# Altium PCB PCB1.PcbDoc
Units mm, origin at the board's own origin, x right, y up, seen from the top; angles counter-clockwise.
Board outline 152.4 x 101.6 mm, 2 copper layers (Top Layer, Bottom Layer); 39 components, 48 nets, 253 pads, 0 vias.
Unrouted connection lines stored in the file: 123.
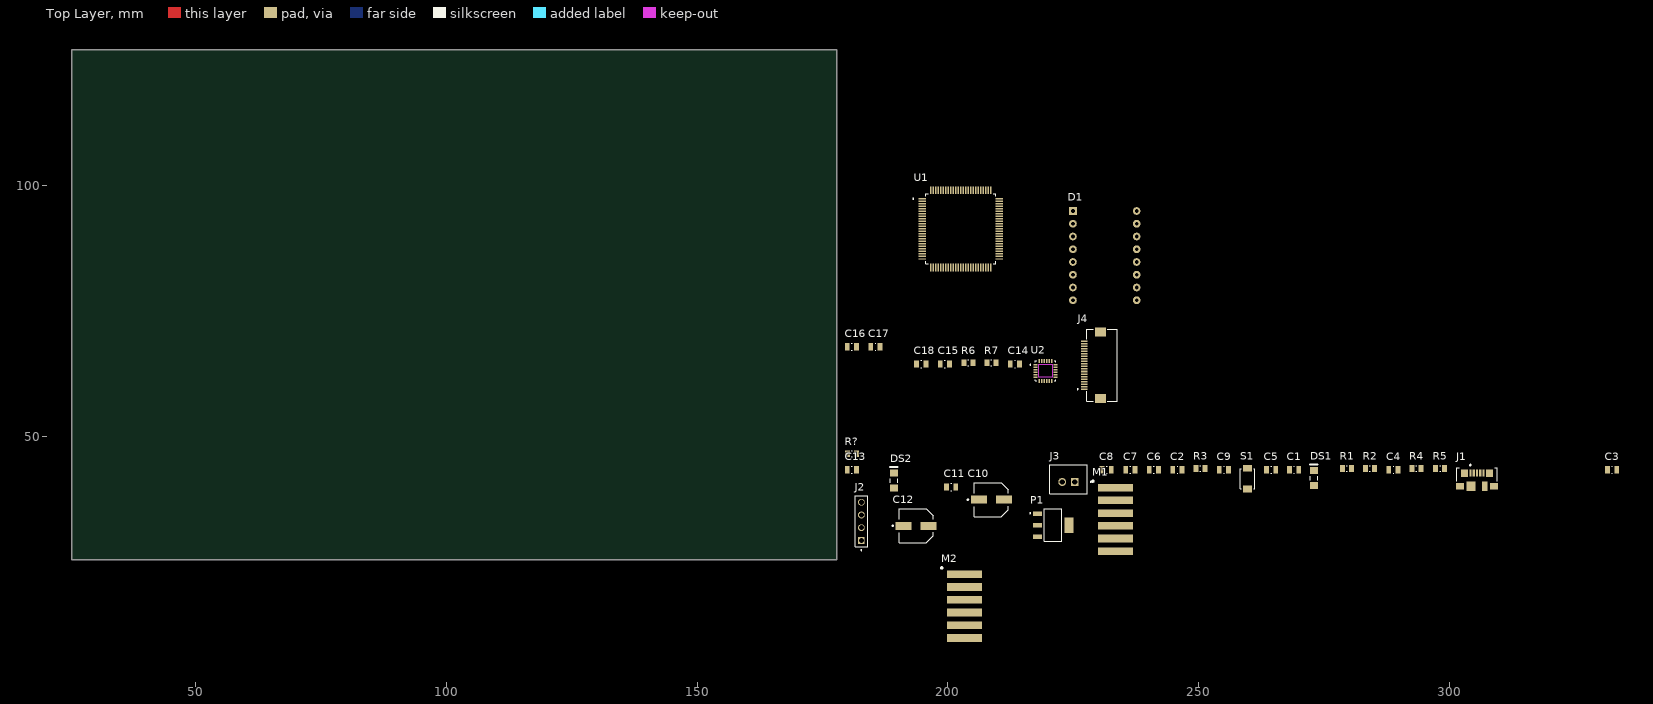
[diagram p0: Top Layer view]
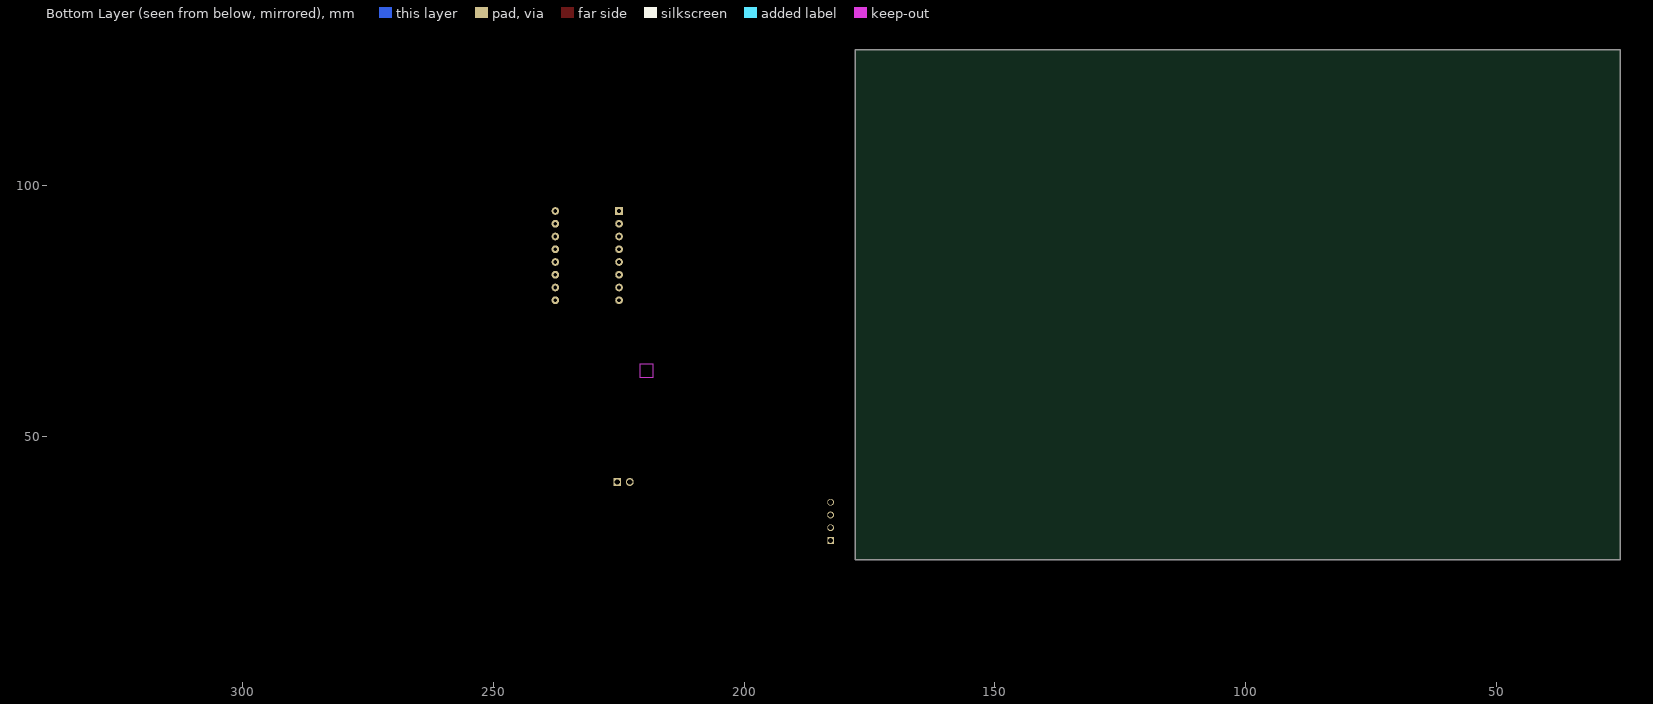
[diagram p1: Bottom Layer view, seen from below]

## Layer stack, top to bottom
Top Solder: solder mask 0.0102, Solder Resist, Dk 3.5
Top Layer: signal copper 0.0356
Dielectric 1: dielectric 0.32, FR-4, Dk 4.8
Bottom Layer: signal copper 0.0356
Bottom Solder: solder mask 0.0102, Solder Resist, Dk 3.5

## Board outline
25.4,25.4 177.8,25.4 177.8,127 25.4,127

## Design rules (kind name [scope] priority, off if disabled: settings)
AssemblyTestPointUsage [All] p1: isadvanced=TRUE
AssemblyTestpoint [All] p1: isadvanced=TRUE testpointundercomponent=TRUE minsize=1.016 maxsize=2.54 preferedsize=1.524 minholesize=0 maxholesize=1.016 preferedholesize=0.813 testpointgrid=0.025 usegrid=TRUE gridtolerance=0 allowsidetop=TRUE allowsidebottom=TRUE
Clearance Clearance_1 [All] p1: isadvanced=TRUE gap=0.254 ignorepadtopadclearanceinfootprint=FALSE except(0: Hole-Hole; 0.127: SMDPad-SMDPad; 0.33: Arc-THPad Arc-Hole Track-THPad Track-Hole SMDPad-THPad SMDPad-Hole THPad-Text THPad-Hole Via-Hole Fill-Hole Poly-Hole Region-Hole Text-Hole)
Clearance Clearance_1 [OnMid vs OnMid] p2: gap=0.254 ignorepadtopadclearanceinfootprint=FALSE sourcerule=41 cellrowname=All cellrowtype=0 cellcolname=All cellcoltype=0 innerlayers=TRUE
Clearance Clearance_2 [(ExistsOnLayer('Top Layer') Or ExistsOnLayer('Bottom Layer')) vs (ExistsOnLayer('Top Layer') Or ExistsOnLayer('Bottom Layer'))] p3: gap=0.254 ignorepadtopadclearanceinfootprint=FALSE sourcerule=41 cellrowname=All cellrowtype=0 cellcolname=All cellcoltype=0 outerlayers=TRUE
Clearance [All] p4: gap=0.254 ignorepadtopadclearanceinfootprint=FALSE ismatrix=TRUE
ComponentClearance [All] p1: isadvanced=TRUE gap=0.254 collisioncheckmode=3 verticalgap=0.254 showdistances=FALSE
FabricationTestPointUsage [All] p1: isadvanced=TRUE valid=0 allowmultiple=FALSE
FabricationTestpoint [All] p1: isadvanced=TRUE side=3 testpointundercomponent=TRUE minsize=1.016 maxsize=2.54 preferedsize=1.524 minholesize=0 maxholesize=1.016 preferedholesize=0.813 testpointgrid=0.025 allowsidetop=TRUE allowsidebottom=TRUE usegrid=TRUE gridtolerance=0
FanoutControl Fanout_BGA [IsBGA] p1: isadvanced=TRUE bgadir=Out bgaviamode=Centered fanoutstyle=Auto fanoutdirection=Alternating viagrid=0.025 // Fanout_BGA (Default Rule)
FanoutControl Fanout_LCC [IsLCC] p2: isadvanced=TRUE bgadir=Out bgaviamode=Centered fanoutstyle=Auto fanoutdirection=Alternating viagrid=0.025 // Fanout_LCC (Default Rule)
FanoutControl Fanout_SOIC [IsSOIC] p3: isadvanced=TRUE bgadir=Out bgaviamode=Centered fanoutstyle=Auto fanoutdirection=Alternating viagrid=0.025 // Fanout_SOIC (Default Rule)
FanoutControl Fanout_Small [(CompPinCount < 5)] p4: isadvanced=TRUE bgadir=Out bgaviamode=Centered fanoutstyle=Auto fanoutdirection=OutThenIn viagrid=0.025 // Fanout_Small (Default Rule)
FanoutControl Fanout_Default [All] p5: isadvanced=TRUE bgadir=Out bgaviamode=Centered fanoutstyle=Auto fanoutdirection=Alternating viagrid=0.025 // Fanout_Default (Default Rule)
Height [All] p1: isadvanced=TRUE minheight=0 maxheight=25.4 prefheight=12.7
HoleSize [All] p1: isadvanced=TRUE absolutevalues=TRUE maxlimit=6.35 minlimit=0.2 maxpercent=80.000 minpercent=20.000
HoleToHoleClearance [All] p1: isadvanced=TRUE gap=0.5 allowstackedmicrovias=TRUE
LayerPairs [All] p1: isadvanced=TRUE enforce=TRUE
MinimumSolderMaskSliver [All] p1: isadvanced=TRUE minsoldermaskwidth=0.254
NetAntennae [All] p1: isadvanced=TRUE netantennaetolerance=0
PasteMaskExpansion [All] p1: isadvanced=TRUE expansion=0
PlaneClearance [All] p1: isadvanced=TRUE clearance=0.508
PlaneConnect [All] p1: isadvanced=TRUE planeconnectstyle=Relief reliefexpansion=0.508 reliefentries=4 reliefconductorwidth=0.254 reliefairgap=0.254
PolygonConnect [All] p1: connectstyle=Relief reliefconductorwidth=0.254 reliefentries=4 polygonreliefangle="90 Angle" airgapwidth=0.254
RoutingCorners [All] p1: isadvanced=TRUE cornerstyle=45-Degree minsetback=2.54 maxsetback=2.54
RoutingPriority [All] p1: isadvanced=TRUE routingpriority=0
RoutingVias RoutingViaStyle_1 [All] p1: isadvanced=TRUE holewidth=0.3 width=0.4 viastyle="Through Hole" minholewidth=0.15 minwidth=0.25 maxholewidth=0.4 maxwidth=0.5
RoutingVias [All] p2: holewidth=0.711 width=1.27 viastyle="Through Hole" minholewidth=0.711 minwidth=1.27 maxholewidth=0.711 maxwidth=1.27
ShortCircuit [All] p1: isadvanced=TRUE allowed=FALSE
SilkToSilkClearance [All] p1: isadvanced=TRUE silktosilkclearance=0.254
SilkToSolderMaskClearance [IsPad] p1: isadvanced=TRUE minsilkscreentomaskgap=0.254 clearancetoexposedcopper=TRUE
SolderMaskExpansion [All] p1: isadvanced=TRUE expansion=0.102 istentingtop=FALSE
SupplyNets "Schematic Supply Nets_1" [InNet('GND')] p1: isadvanced=TRUE voltage=0.000
SupplyNets "Schematic Supply Nets" [InNet('+3V3')] p2: isadvanced=TRUE voltage=0.000
UnRoutedNet [All] p1: isadvanced=TRUE checkbadconnections=TRUE
UnpouredPolygon [All] p1: isadvanced=TRUE
Width MaxMinWidth_1 [All] p1: isadvanced=TRUE maxlimit=1 minlimit=0.1 preferedwidth=0.3 minimp=50.000000 maximp=50.000000 favimp=50.000000
Width [All] p2: maxlimit=0.254 minlimit=0.254 preferedwidth=0.254
4 further rules are at their usual default settings.

## Classes and differential pairs
net class SENS[10..1]: SENS1 SENS2 SENS3 SENS4 SENS5 SENS6 SENS7 SENS8 SENS9 SENS10
component class Pheripherials: BLU? C14 C15 C16 C17 C18 D1 DS2 J4 M1 M2 R6 R7 R? U2
component class Main_board: C1 C2 C3 C4 C5 C6 C7 C8 C9 C10 C11 C12 C13 DS1 J1 J2 J3 P1 R1 R2 R3 R4 R5 S1 U1

## Components (designator, comment, footprint, x,y, rotation, side; value= is the part's Value field where it differs from the comment)
C1 "2.2u" FP-CC0805-0_85-MFG 268.986,43.307 r0 top value="100 nF"
C2 "2.2u" FP-CC0805-0_85-MFG 245.745,43.307 r0 top value="100 nF"
C3 "100n" FP-CC0805-0_85-MFG 332.359,43.307 r0 top value="100 nF"
C4 "100n" FP-CC0805-0_85-MFG 288.798,43.307 r0 top value="100 nF"
C5 "100n" FP-CC0805-0_85-MFG 264.414,43.307 r0 top value="100 nF"
C6 "100n" FP-CC0805-0_85-MFG 241.046,43.307 r0 top value="100 nF"
C7 "100n" FP-CC0805-0_85-MFG 236.347,43.307 r0 top value="100 nF"
C8 "2.2u" FP-CC0805-0_85-MFG 231.648,43.307 r0 top value="100 nF"
C9 "100n" FP-CC0805-0_85-MFG 255.016,43.307 r0 top value="100 nF"
C10 "47u" FP-FPD-MFG 208.661,37.338 r0 top
C11 "100n" FP-CC0805-0_85-MFG 200.66,39.878 r0 top value="100 nF"
C12 "47u" FP-FPD-MFG 193.675,32.131 r0 top
C13 "100n" FP-CC0805-0_85-MFG 180.848,43.307 r0 top value="100 nF"
C14 "100n" FP-CC0805-0_85-MFG 213.36,64.389 r0 top value="100 nF"
C15 "100n" FP-CC0805-0_85-MFG 199.39,64.389 r0 top value="100 nF"
C16 "2n2" FP-CC0805-0_85-MFG 180.848,67.818 r0 top value="100 nF"
C17 "22p" FP-CC0805-0_85-MFG 185.547,67.818 r0 top value="100 nF"
C18 "22p" FP-CC0805-0_85-MFG 194.691,64.389 r0 top value="100 nF"
D1 "TB6612FNG board" "TB6612FNG board footprint" 224.917,94.869 r0 top
DS1 "PG1102W-TR" STEC-1102W_V 272.923,41.656 r90 top
DS2 "PG1102W-TR" STEC-1102W_V 189.23,41.148 r90 top
J1 "Micro USB B connector" FP-473460001-MFG 305.435,40.386 r0 top
J2 "SWD probe" TE_1987374-4 182.753,29.21 r90 top
J3 "JST connector" JST_B2B-XH-A(LF)(SN) 224.028,41.402 r0 top
J4 "FFC connector" GCT_FFC2B35-20-G_REVA2 230.378,64.135 r90 top
M1 "Pololu Encoders" "Encoders Pololu footprint" 231.426,33.401 r0 top
M2 "Pololu Encoders" "Encoders Pololu footprint" 201.327,16.129 r0 top
P1 "LM1117MP" SOT230P700X180-4N 220.98,32.258 r0 top
R1 "10k" RESC2013X60X35NL10T20 279.527,43.561 r0 top
R2 "10k" RESC2013X60X35NL10T20 284.099,43.561 r0 top
R3 "470R" RESC2013X60X35NL10T20 250.317,43.561 r0 top
R4 "4k7" RESC2013X60X35NL10T20 293.37,43.561 r0 top
R5 "10k" RESC2013X60X35NL10T20 298.069,43.561 r0 top
R6 "3k" RESC2013X60X35NL10T20 204.089,64.643 r0 top
R7 "3k" RESC2013X60X35NL10T20 208.661,64.643 r0 top
R? "470R" RESC2013X60X35NL10T20 180.848,46.482 r0 top
S1 "Switch" SW_TS-1088-AR02016 259.715,41.529 r90 top
U1 "STM32H743" STM32H743 202.565,91.313 r0 top
U2 "MPU-6050" QFN50P400X400X95-24N 219.456,62.992 r0 top

## Footprints (in the part's own frame and the unit in brackets; to place one, negate y for a bottom-side part, rotate by r counter-clockwise, add the part's x,y. Pads: shape width x height; smd on the part's side, far side on the other; paste and mask are expansions set on the pad)
"Encoders Pololu footprint" [mm]
  rect 7x1.524 smd: 1(2,6.35) 2(2,3.81) 3(2,1.27) 4(2,-1.27) 5(2,-3.81) 6(2,-6.35)
  silkscreen extent -2.69,7.47 -2.39,7.77, body extent 2.44,-5.8 7.62,5.8, height 10.64
FP-473460001-MFG [mm]
  rect 0.45x1.38 smd paste+0 mask+0: 1(-1.3,2.31) 2(-0.65,2.31) 3(0,2.31) 4(0.65,2.31) 5(1.3,2.31)
  rect 1.425x1.55 smd paste+0 mask+0: 6(-2.488,2.225) 7(2.488,2.225)
  rect 1.65x1.3 smd paste+0 mask+0: 8(-3.375,-0.35) 11(3.375,-0.35)
  rect 1.8x1.9 smd paste+0 mask+0: 9(-1.15,-0.35)
  rect 1x1.9 smd paste+0 mask+0: 10(1.55,-0.35)
  silkscreen extent -4.05,0.67 4.05,3.97, body extent -4.3,-2.48 4.3,3.45, height 0.25
FP-CC0805-0_85-MFG [mm]
  rect 0.95x1.4 smd paste+0 mask+0: 1(-0.925,0) 2(0.925,0)
  silkscreen extent -0.08,-0.72 0.08,0.72, body extent -1.6,-1.05 1.6,1.05, height 0.25
FP-FPD-MFG [mm]
  rect 3.2x1.6 smd paste+0 mask+0: 1(-2.5,0) 2(2.5,0)
  silkscreen extent -4.8,-3.4 3.4,3.4, body extent -4.35,-3.65 4.35,3.65, height 0.25
GCT_FFC2B35-20-G_REVA2 [mm]
  rect 0.3x1.3 smd: 1(-4.75,3.25) 2(-4.25,3.25) 3(-3.75,3.25) 4(-3.25,3.25) 5(-2.75,3.25) 6(-2.25,3.25) 7(-1.75,3.25) 8(-1.25,3.25) 9(-0.75,3.25) 10(-0.25,3.25) 11(0.25,3.25) 12(0.75,3.25) 13(1.25,3.25) 14(1.75,3.25) 15(2.25,3.25) 16(2.75,3.25) 17(3.25,3.25) 18(3.75,3.25) 19(4.25,3.25) 20(4.75,3.25)
  rect 1.8x2.2 smd: S1(-6.65,0) S2(6.65,0)
  silkscreen extent -7.2,-3.35 7.2,4.62, body extent -7.2,-3.34 7.2,3.41, height 2
JST_B2B-XH-A(LF)(SN) [mm]
  rect 1.575x1.575 / inner round 1.575 / far side rect 1.575x1.575 hole 1.05: 1(1.25,-0.525)
  round 1.575 hole 1.05: 2(-1.25,-0.525)
  silkscreen extent -3.7,-2.88 4.54,2.88, body extent -3.7,-2.88 3.7,2.88, height 7
QFN50P400X400X95-24N [mm]
  rect 0.79x0.28 smd: 1(-1.97,1.25) 2(-1.97,0.75) 3(-1.97,0.25) 4(-1.97,-0.25) 5(-1.97,-0.75) 6(-1.97,-1.25) 13(1.97,-1.25) 14(1.97,-0.75) 15(1.97,-0.25) 16(1.97,0.25) 17(1.97,0.75) 18(1.97,1.25)
  rect 0.28x0.79 smd: 7(-1.25,-1.97) 8(-0.75,-1.97) 9(-0.25,-1.97) 10(0.25,-1.97) 11(0.75,-1.97) 12(1.25,-1.97) 19(1.25,1.97) 20(0.75,1.97) 21(0.25,1.97) 22(-0.25,1.97) 23(-0.75,1.97) 24(-1.25,1.97)
  Keep-Out Layer region: 1.35,-1.3 -1.35,-1.3 -1.35,1.3 1.35,1.3
  silkscreen extent -3.1,-2 2,2, body extent -2,-2 2,2, height 0.93
RESC2013X60X35NL10T20 [mm] "Chip Resistor, 2-Leads, Body 2.1x1.35mm, IPC Medium Density"
  rect 1x1.35 smd: 1(-0.9,0) 2(0.9,0)
  silkscreen extent -0.1,-0.58 0.1,0.58, body extent -1.05,-0.68 1.05,0.67, height 0.6
SOT230P700X180-4N [mm]
  rect 1.76x0.88 smd: 1(-3.125,2.3) 2(-3.125,0) 3(-3.125,-2.3)
  rect 1.76x3.14 smd: 4(3.125,0)
  silkscreen extent -4.7,-3.25 1.75,3.25
STEC-1102W_V [mm] "SMD, 2-Leads, Body 3x1.5mm"
  rect 1.4x1.6 smd: 1(-1.5,0) 2(1.5,0)
  silkscreen extent -0.4,-0.75 2.7,0.75, body extent -1.5,-0.75 1.5,0.75, height 1.78
STM32H743 [mm]
  rrect25% 1.56x0.28 smd: 1(-7.68,6) 2(-7.68,5.5) 3(-7.68,5) 4(-7.68,4.5) 5(-7.68,4) 6(-7.68,3.5) 7(-7.68,3) 8(-7.68,2.5) 9(-7.68,2) 10(-7.68,1.5) 11(-7.68,1) 12(-7.68,0.5) 13(-7.68,0) 14(-7.68,-0.5) 15(-7.68,-1) 16(-7.68,-1.5) 17(-7.68,-2) 18(-7.68,-2.5) 19(-7.68,-3) 20(-7.68,-3.5) 21(-7.68,-4) 22(-7.68,-4.5) 23(-7.68,-5) 24(-7.68,-5.5) 25(-7.68,-6) 51(7.68,-6) 52(7.68,-5.5) 53(7.68,-5) 54(7.68,-4.5) 55(7.68,-4) 56(7.68,-3.5) 57(7.68,-3) 58(7.68,-2.5) 59(7.68,-2) 60(7.68,-1.5) 61(7.68,-1) 62(7.68,-0.5) 63(7.68,0) 64(7.68,0.5) 65(7.68,1) 66(7.68,1.5) 67(7.68,2) 68(7.68,2.5) 69(7.68,3) 70(7.68,3.5) 71(7.68,4) 72(7.68,4.5) 73(7.68,5) 74(7.68,5.5) 75(7.68,6)
  rrect25% 0.28x1.56 smd: 26(-6,-7.68) 27(-5.5,-7.68) 28(-5,-7.68) 29(-4.5,-7.68) 30(-4,-7.68) 31(-3.5,-7.68) 32(-3,-7.68) 33(-2.5,-7.68) 34(-2,-7.68) 35(-1.5,-7.68) 36(-1,-7.68) 37(-0.5,-7.68) 38(0,-7.68) 39(0.5,-7.68) 40(1,-7.68) 41(1.5,-7.68) 42(2,-7.68) 43(2.5,-7.68) 44(3,-7.68) 45(3.5,-7.68) 46(4,-7.68) 47(4.5,-7.68) 48(5,-7.68) 49(5.5,-7.68) 50(6,-7.68) 76(6,7.68) 77(5.5,7.68) 78(5,7.68) 79(4.5,7.68) 80(4,7.68) 81(3.5,7.68) 82(3,7.68) 83(2.5,7.68) 84(2,7.68) 85(1.5,7.68) 86(1,7.68) 87(0.5,7.68) 88(0,7.68) 89(-0.5,7.68) 90(-1,7.68) 91(-1.5,7.68) 92(-2,7.68) 93(-2.5,7.68) 94(-3,7.68) 95(-3.5,7.68) 96(-4,7.68) 97(-4.5,7.68) 98(-5,7.68) 99(-5.5,7.68) 100(-6,7.68)
  silkscreen extent -9.54,-7 7,7
SW_TS-1088-AR02016 [mm]
  rect 1.35x1.8 smd: 1(-2.075,0) 2(2.075,0)
  silkscreen extent -2,-1.45 2,1.45
"TB6612FNG board footprint" [mil]
  rect 60x60 hole 30: 1(0,0)
  round 60 hole 30: 2(0,-100) 3(0,-200) 4(0,-300) 5(0,-400) 6(0,-500) 7(0,-600) 8(0,-700) 9(500,0) 10(500,-100) 11(500,-200) 12(500,-300) 13(500,-400) 14(500,-500) 15(500,-600) 16(500,-700)
  body extent -50,-750 550,50, height 111
TE_1987374-4 [mm]
  rect 1.35x1.35 hole 1: 1(0,0)
  round 1.35 hole 1: 2(2.54,0) 3(5.08,0) 4(7.62,0)
  silkscreen extent -2.02,-1.25 8.89,1.25

## Part data
C1 C2 C3 C4 C5 C6 C7 C8 C9 C11 C13 C14 C15 C16 C17 C18: library part CMP-1036-04402-6, "CAP CER 0.1UF 16V X7R 0805", Capacitance="100 nF", Manufacturer=Yageo, Manufacturer Part Number=CC0805KRX7R7BB104, Package=CC0805-0.85, Temperature="-30°C to +85°C", Temperature Characteristic=X7R, Temperature Range High=+85°C, Temperature Range Low=-30°C, Tolerance=0.1, Voltage Rating="16 V", Automotive=No, Category=Cap, ComponentLink2Description=Datasheet, ComponentLink2URL=http://www.yageo.com/documents/recent/UPY-GPHC_Y5V_6.3V-to-50V_8.pdf, Device Class L1="Passive Components", Device Class L2=Capacitors, Device Class L3="Ceramic Capacitors", Digikey Description="CAP CER 0.1UF 16V X7R 0805", Footprint Url=http://www.yageo.com/exep/pages/download/literatures/UPY-C_GEN_24.pdf, Height=0.95mm, Ipc Land Pattern Name=CAPC200125X85, Lead Free=Yes, Material=Ceramic, Mouser Description="Multilayer Ceramic Capacitors MLCC - SMD/SMT 100nF 16V X7R 10%", Octopart=https://octopart.com/cc0805krx7r7bb104-yageo-39467769, RoHS=TRUE
C10 C12: library part CMP-2000-06216-2, "CAP ALUM 47UF 20% 35V SMD", Capacitance=47uF, Case/Package=Radial, ESR (Equivalent Series Resistance)=260mR, Leakage Current=3uA, Max Operating Temperature=105°C, Min Operating Temperature=-55°C, Package Quantity=1, Ripple Current=300mA, Tolerance=20%, Voltage=35V, Construction=Cylindrical, Contact Plating=Tin, Diameter=6.3mm, Dissipation Factor=0.12%, Height=5.8mm, Height - Seated (Max)=0.228inch, Lead Free="Lead Free", Lead Pitch=1.8mm, Length=5.8mm, Life (Hours)=2000Hour, Material=Aluminium, Mount="Surface Mount", Number of Pins=2, Packaging="Tape and Reel", Radiation Hardening=No, REACH SVHC="No SVHC", Ripple Current (AC)=300mA, RoHS Compliant=Yes, Series=FP, Termination=SMD/SMT, Voltage Rating=35V, Voltage Rating (DC)=35V
DS1 DS2: library part CMP-2000-06890-1, "Green LED, 567 nm, 2.1 V, 30 mA, -30 to 85 degC, 2-Pin SMD, RoHS, Tape and Reel", Emitting Color=YellowGreen, Forward Current=30mA, Forward Voltage=2.5V, Manufacturer="Stanley Electric", Operating Temp Range=-30Cto85C, Operating Temperature Classification=Commercial, Package Description="2-Pin Surface Mounted Device , Body 3 x 1.5 mm", Package Reference=1102W, Package Type=SMD, Power Dissipation=75W, Reverse Voltage=4V, Test Current (It)=20mA, Chip Material=GaP, Datasheet URL=http://media.digikey.com/pdf/Data%20Sheets/Stanley%20Electric%20PDFs/1102W_Series.pdf, Datasheet Version=08/2007, DELETED=Compliant, Dominant Wave Length=567nm, High Brightness=No, Lens Dimensions=2x1.5x0.9mm, Lum Intensity=12mcd, Luminous Intensity=12mcd, Main Category=ChipLED, Manufacturer URL=http://www.stanley-electric.com/, Mounting=SurfaceMount, Mounting Technology=SurfaceMount, Number of  Elements=1, Packaging=TapeandReel, Peak Wavelength=560nm, Pin Count=2, Product Depth (mm)=1.5mm, Product Height (mm)=1.5mm, Product Length (mm)=3mm, Rad Hardened=No, Shape Type=Rectangular, Type=Uni-Color, Viewing Angle=69/85deg
J1: library part CMP-2000-05246-2, "CONN RCPT USB2.0 MICRO B SMD R/A", Current Rating=1.8A, Manufacturer=Molex, Manufacturer Part Number=473460001, Package=0, Temperature="-30°C to +85°C", Temperature Range High=+85°C, Temperature Range Low=-30°C, Voltage Rating=30V, Automotive=No, Category=Conn, ComponentLink2Description=Datasheet, ComponentLink2URL=https://www.molex.com/webdocs/datasheets/pdf/en-us/0473460001_IO_CONNECTORS.pdf, Conn Orientation="Right Angle", Contact Material=Gold,Nickel, Device Class L1=Connectors, Device Class L2="USB Connectors", Device Class L3=unset, Digikey Description="CONN RCPT USB2.0 MICRO B SMD R/A", Footprint Url=https://www.molex.com/pdm_docs/sd/473460001_sd.pdf, Height=2.945mm, Is Female=yes, Lead Free=Yes, Number of Contacts=5, Octopart=https://octopart.com/47346-0001-molex-7164928, Pitch=0.65mm, RoHS=TRUE, Shielding=true, Usb Standard="USB 2.0"
J2: library part 1987374-4, "Pin Connector AMPMODU II PIN HEADER SINGLE ROW 4 POS", Package=None, Availability=Unavailable, MF="TE Connectivity", MP=1987374-4, Price=None, SnapEDA_Link=https://www.snapeda.com/parts/1987374-4/TE%20Connectivity/view-part/3100872/?ref=snap, TE_purchase_URL=https://www.te.com/usa-en/product-1987374-4.html?te_bu=Cor&te_type=disp&te_campaign=seda_glo_cor-seda-global-disp-prtnr-fy19-seda-model-bom-cta_sma-317_1&elqCampaignId=32493
J3: library part B2B-XH-A(LF)(SN), "Connector Header Through Hole 2 position 0.098 (2.50mm)", Package=None, Check_prices=https://www.snapeda.com/parts/B2B-XH-A(LF)(SN)/JST+Sales+America+Inc./view-part/?ref=eda, MF="JST Sales America Inc.", MP=B2B-XH-A(LF)(SN), SnapEDA_Link=https://www.snapeda.com/parts/B2B-XH-A(LF)(SN)/JST+Sales+America+Inc./view-part/?ref=snap
J4: library part FFC2B35-20-G
R1 R2 R3 R4 R5 R6 R7 R?: library part CMP-1659-00013-4, "Chip Resistor, 10 KOhm, +/- 1%, 0.125 W, -55 to 155 degC, 0805 (2012 Metric), RoHS, Tape and Reel", Manufacturer=Yageo, Max Operating Temperature="155 degC", Min Operating Temperature="-55 degC", Package Quantity=5000, Voltage Rating="150 V", ComponentLink1Description="Manufacturer URL", ComponentLink1URL=http://www.yageo.com/, ComponentLink2Description=Datasheet, ComponentLink2URL=http://www.yageo.com/documents/recent/PYu-RC_Group_51_RoHS_L_04.pdf, DatasheetVersion="Rev. 4, 02/2016", Height="0.5 mm", Length="2 mm", Mount="Surface Mount", Mounting Technology="Surface Mount", PackageDescription="2-Pin Surface Mounted Device, Body 2 x 1.25 mm", PackageReference=0805, Packaging="Tape and Reel", Pins=2, REACH SVHC="No SVHC", RoHSCompliant=true
S1: library part TS-1088-AR02016, "50mA 4mm 100MÎ© 100,000 Times 12V 160gf 3mm 2mm Round Button Vertical welding SPST SMD Tactile Switches ROHS", Package=Package, Check_prices=https://www.snapeda.com/parts/TS-1088-AR02016/Xunpu/view-part/?ref=eda, MF=Xunpu, MP=TS-1088-AR02016, SnapEDA_Link=https://www.snapeda.com/parts/TS-1088-AR02016/Xunpu/view-part/?ref=snap
U1: "ARMÂ® CortexÂ®-M7 STM32H7 Microcontroller IC 32-Bit 480MHz 2MB (2M x 8) FLASH 100-LQFP (14x14)", Package=None, Availability=Unavailable, MP=STM32H743VIT6, Price=None
U2: "MPU-6050 series Accelerometer, Gyroscope, 3 Axis Sensor Evaluation Board", Package="QFN-24 InvenSense", Check_prices=https://www.snapeda.com/parts/MPU-6050/TDK+InvenSense/view-part/?ref=eda, MF="TDK InvenSense", MP=MPU-6050, SnapEDA_Link=https://www.snapeda.com/parts/MPU-6050/TDK+InvenSense/view-part/?ref=snap

## Nets (pads, with @x,y where several pads share a name; then routed paths per layer and width w, separated by ;. In a path a pad name is that pad's centre, name@x,y a point inside that pad or via, vN(x,y) a via of type N, cw(c..) or ccw(c..) an arc to the next point about the centre after c; other vN are vias at no path point)
+3V3: C3.1 C4.1 C5.1 C6.1 C7.1 C8.1 C12.2 C13.2 C14.1 D1.2 DS1.1 DS2.1 J2.4 J4.1 M1.4 M2.4 P1.2 P1.4 R2.1 R6.1 R7.1 U1.6 U1.11 U1.20 U1.21 U1.27 U1.50 U1.75 U1.100 U2.8 U2.13
BLU_*RESET: U1.85
BLU_ABN_MEM: U1.84
BLU_RX: U1.87
BLU_TX: U1.86
D_A_IN_1: D1.11 U1.57
D_A_IN_2: D1.10 U1.58
D_B_IN_1: D1.13 U1.59
D_B_IN_2: D1.14 U1.60
D_OUT_A1: D1.3 M1.6
D_OUT_A2: D1.4 M1.5
D_OUT_B1: D1.6 M2.6
D_OUT_B2: D1.5 M2.5
D_PWM_A: D1.9 U1.61
D_PWM_B: D1.15 U1.62
D_STBY: D1.12 U1.56
ENC1_OUT_A: M1.3 U1.77
ENC1_OUT_B: M1.2 U1.89
ENC2_OUT_A: M2.3 U1.63
ENC2_OUT_B: M2.2 U1.64
GND: C1.1 C2.2 C3.2 C4.2 C5.2 C6.2 C7.2 C8.2 C9.2 C10.1 C11.1 C12.1 C13.1 C14.2 C15.1 C16.1 C17.2 C18.2 D1.1 D1.8 D1.16 J1.5 J2.2 J3.2 J4.20 M1.1 M2.1 P1.1 R1.1 R3.2 R5.2 R?.2 S1.2 U1.10 U1.19 U1.26 U1.49 U1.74 U1.99 U2.1 U2.11 U2.18
"MCU BOOT": R1.2 U1.94
"MCU NRESET": C9.1 R2.2 S1.1 U1.14
"MCU VCAP": C1.2 C2.1 U1.48 U1.73
"MPU INT": U1.95 U2.12
"MPU SCL": C17.1 R6.2 U1.92 U2.23
"MPU SDA": C18.1 R7.2 U1.93 U2.24
NetC15_2: C15.2 U2.10
NetC16_2: C16.2 U2.20
NetDS1_2: DS1.2 R3.1
NetDS2_2: DS2.2 R?.1
NetJ1_1: J1.1 R4.1
SENS1: J4.2 U1.22
SENS2: J4.3 U1.23
SENS3: J4.4 U1.24
SENS4: J4.5 U1.25
SENS5: J4.6 U1.28
SENS6: J4.7 U1.29
SENS7: J4.8 U1.30
SENS8: J4.9 U1.31
SENS9: J4.10 U1.32
SENS10: J4.11 U1.33
SWCLK: J2.3 U1.76
SWDIO: J2.1 U1.72
USB_D_N: J1.2 U1.70
USB_D_P: J1.3 U1.71
VBAT: C10.2 C11.2 D1.7 J3.1 P1.3
"VBUS Sens": R4.2 R5.1 U1.68
pads on no net: J1.4 J1.6 J1.7 J1.8 J1.9 J1.10 J1.11 J4.12 J4.13 J4.14 J4.15 J4.16 J4.17 J4.18 J4.19 J4.S1 J4.S2 U1.1 U1.2 U1.3 U1.4 U1.5 U1.7 U1.8 U1.9 U1.12 U1.13 U1.15 U1.16 U1.17 U1.18 U1.34 U1.35 U1.36 U1.37 U1.38 U1.39 U1.40 U1.41 U1.42 U1.43 U1.44 U1.45 U1.46 U1.47 U1.51 U1.52 U1.53 U1.54 U1.55 U1.65 U1.66 U1.67 U1.69 U1.78 U1.79 U1.80 U1.81 U1.82 U1.83 U1.88 U1.90 U1.91 U1.96 U1.97 U1.98 U2.2 U2.3 U2.4 U2.5 U2.6 U2.7 U2.9 U2.14 U2.15 U2.16 U2.17 U2.19 U2.21 U2.22